# Altium PCB BreakoutBoard.PcbDoc
Units mm, origin at the board's own origin, x right, y up, seen from the top; angles counter-clockwise.
Board outline 104.01 x 101.6 mm, 4 copper layers (Top Layer, Layer 1, Layer 2, Bottom Layer), stack 0.603 mm thick; 14 components, 89 nets, 319 pads, 0 vias.
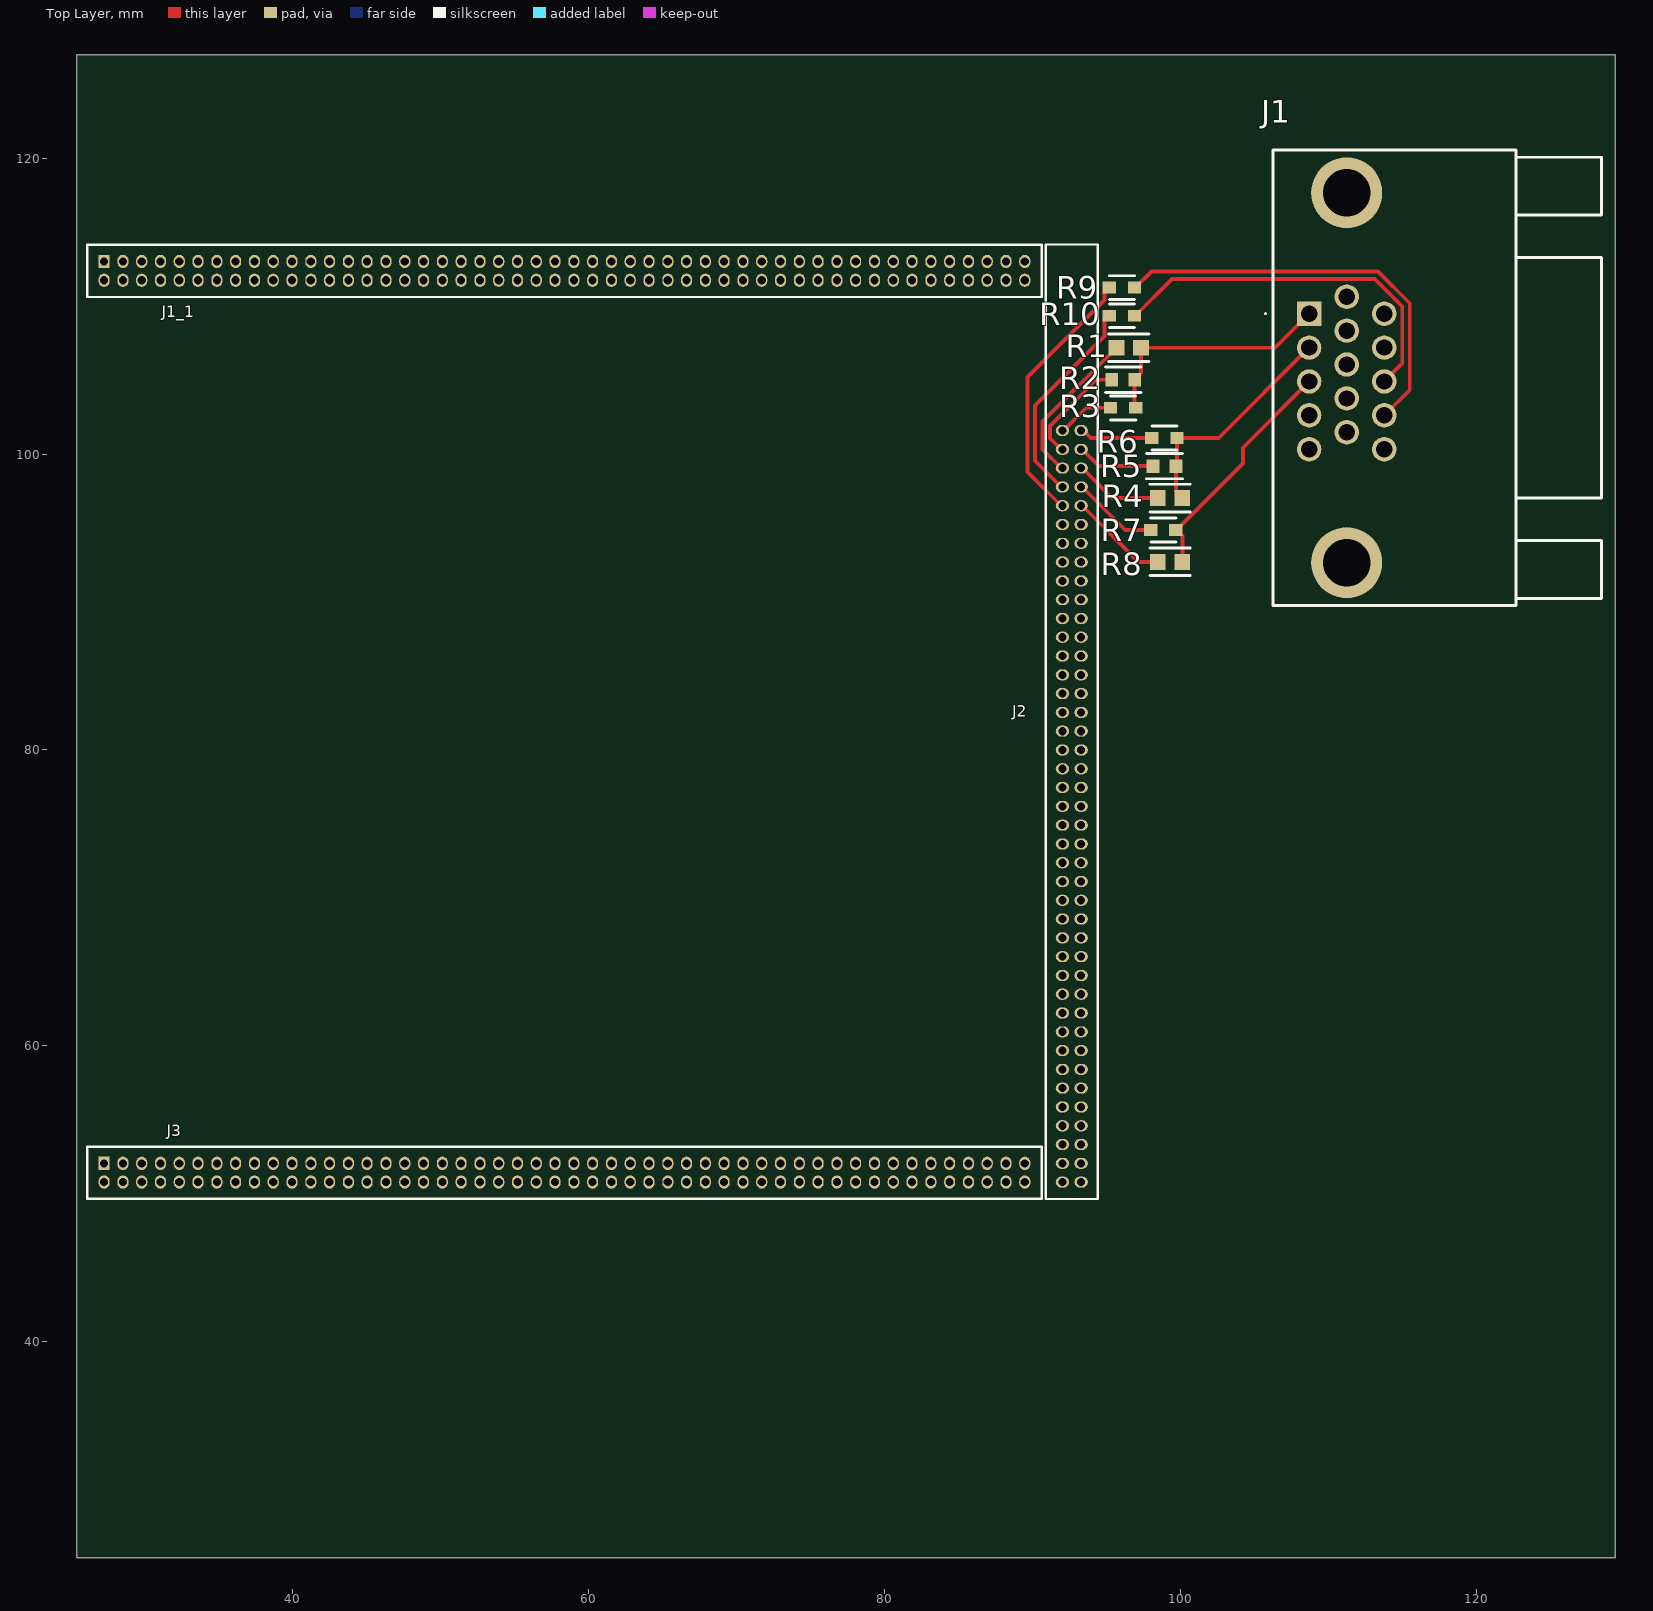
[diagram p0: Top Layer view]
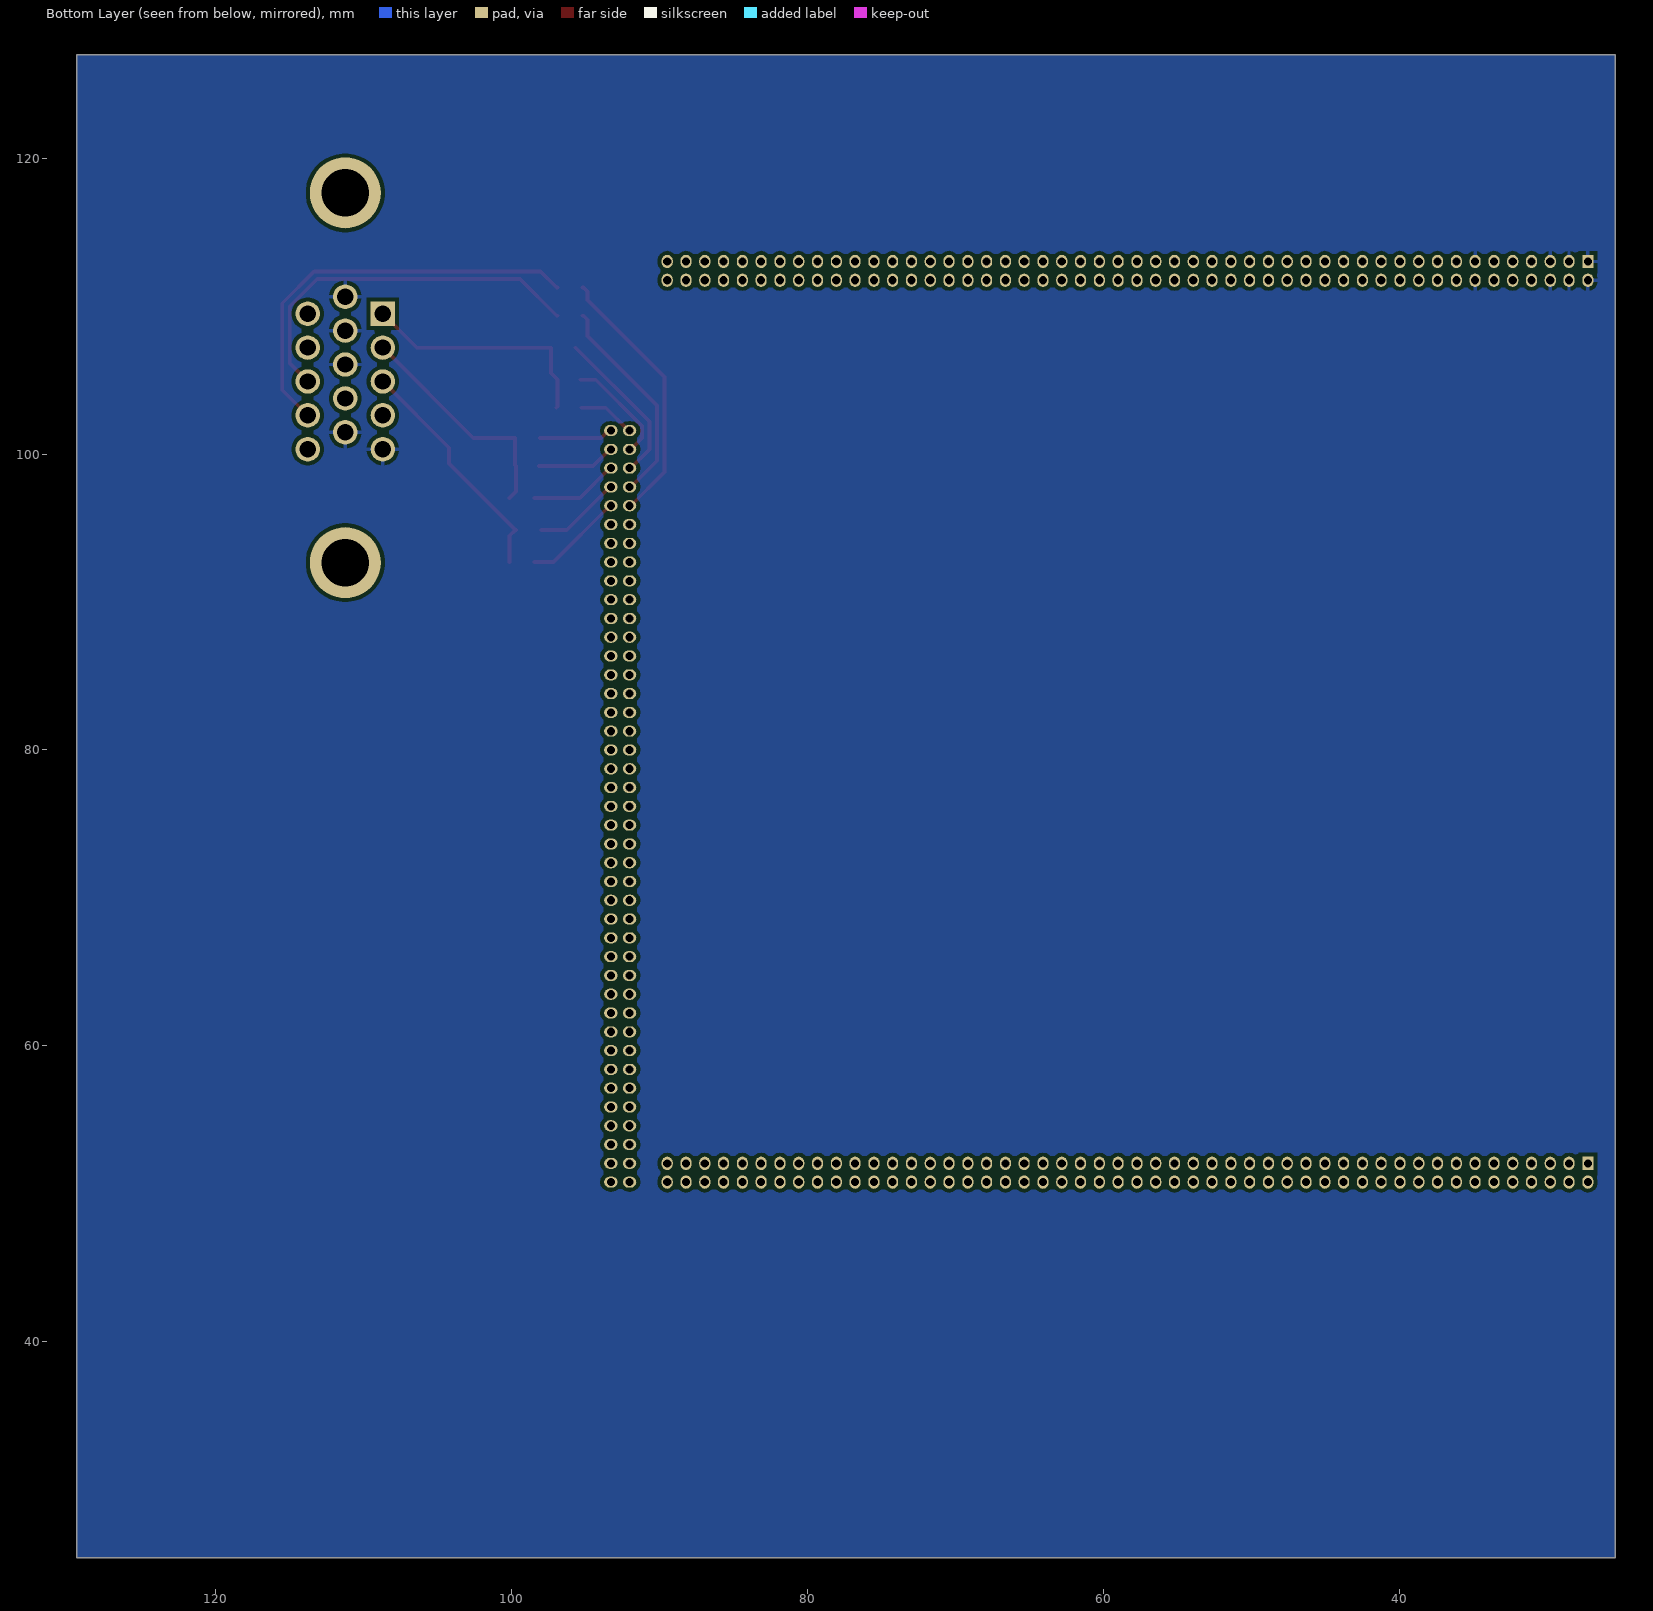
[diagram p1: Bottom Layer view, seen from below]
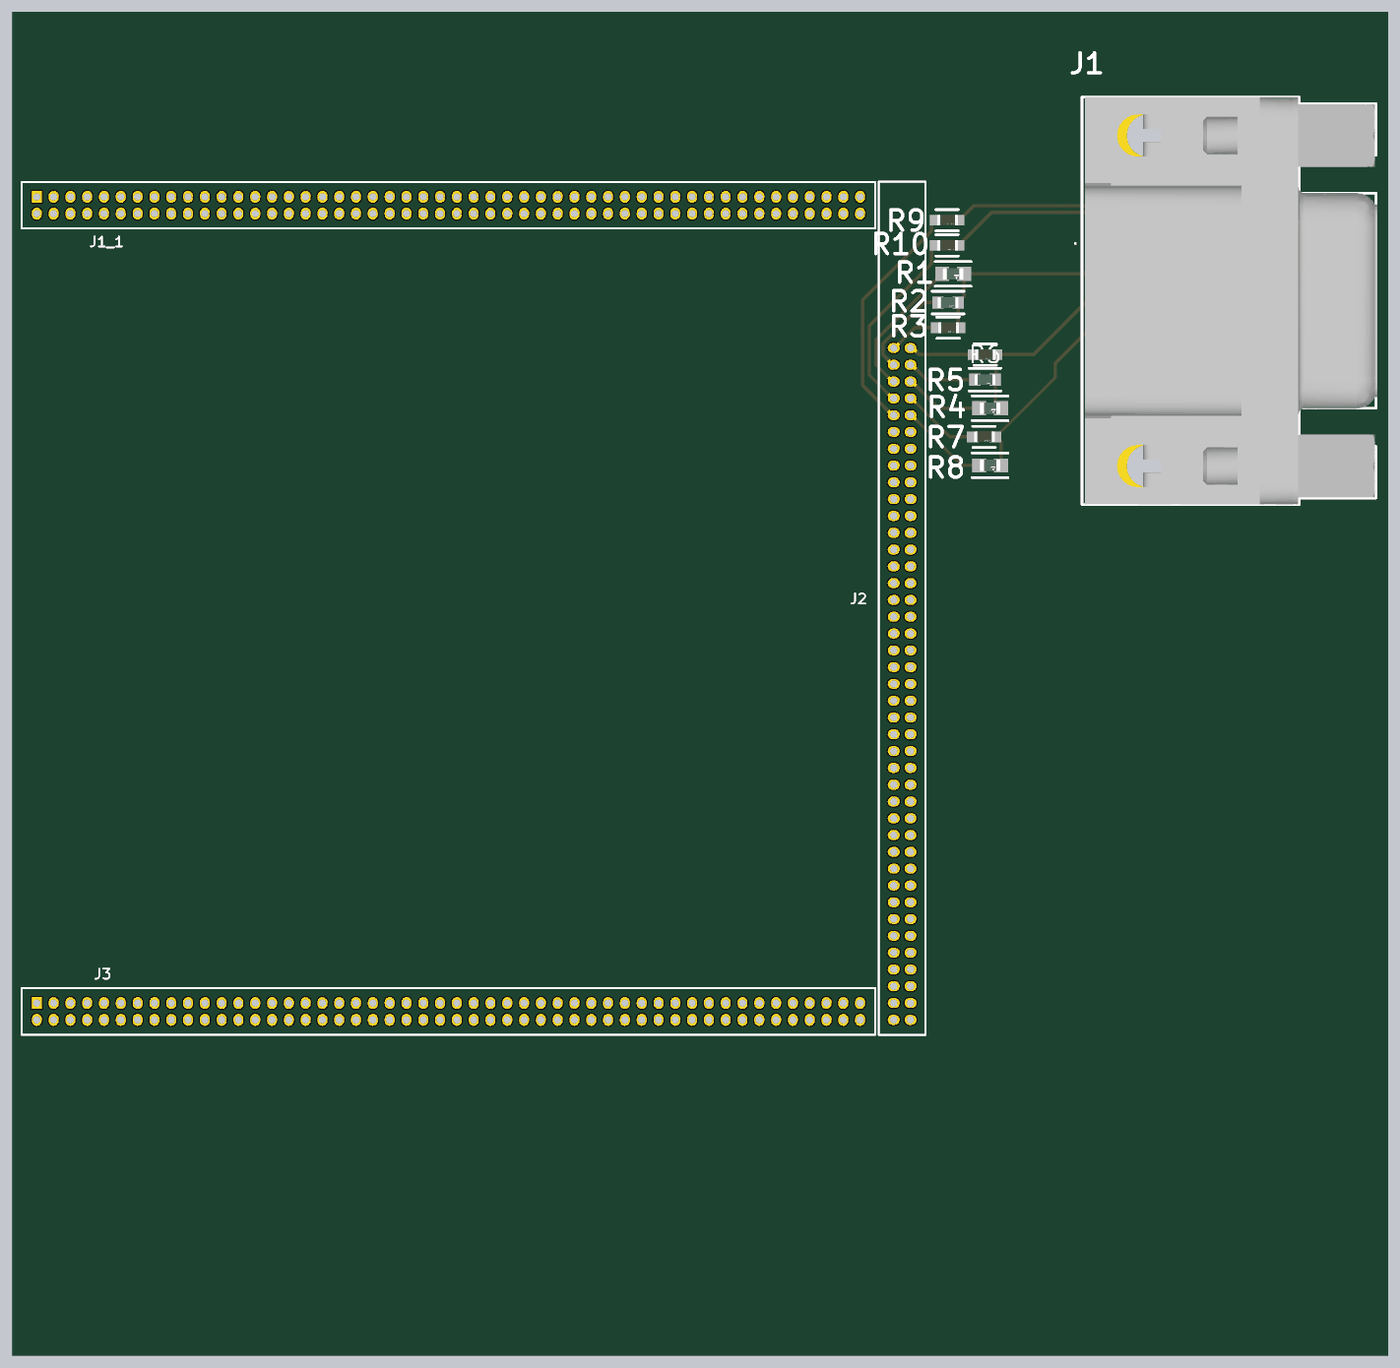
[diagram p2: 3D render of the assembled board from above, using the file's embedded part models]

## Layer stack, top to bottom
Top Solder: solder mask 0.0102, Solder Resist, Dk 3.5
Top Layer: signal copper 0.035
Dielectric 2: prepreg 0.0711, PP-006, Dk 4.1
Layer 1: signal copper 0.0356
Dielectric 1: dielectric 0.32, FR-4, Dk 4.8
Layer 2: signal copper 0.0356
Dielectric 3: prepreg 0.0711, PP-006, Dk 4.1
Bottom Layer: signal copper 0.035
Bottom Solder: solder mask 0.0102, Solder Resist, Dk 3.5

## Board outline
25.4,25.4 129.413,25.4 129.413,127 25.4,127

## Design rules (kind name [scope] priority, off if disabled: settings)
Clearance [All] p1: gap=0.254 ignorepadtopadclearanceinfootprint=FALSE
PolygonConnect [All] p1: connectstyle=Relief reliefconductorwidth=0.254 reliefentries=4 polygonreliefangle="90 Angle" airgapwidth=0.254
RoutingVias [All] p1: holewidth=0.711 width=1.27 viastyle="Through Hole" minholewidth=0.711 minwidth=1.27 maxholewidth=0.711 maxwidth=1.27
SolderMaskExpansion [All] p1: expansion=0.102 istentingtop=FALSE
SupplyNets "Schematic Supply Nets" [InNet('GND')] p1: voltage=0.000
Width [All] p1: maxlimit=0.254 minlimit=0.254 preferedwidth=0.254
30 further rules are at their usual default settings.

## Classes and differential pairs
component class VGA: J1 R1 R2 R3 R4 R5 R6 R7 R8 R9 R10
component class FPGA_IO: U?

## Components (designator, comment, footprint, x,y, rotation, side; value= is the part's Value field where it differs from the comment)
J1 "L77HDE15SD1CH4FVGA" L77HDE15SD1CH4FVGA 108.712,109.486 r90 top
J1_1 "DIP100-1.27" CON100_1.27#1 27.262,113.017 r270 top locked
J2 "DIP100-1.27" CON100_1.27#2 93.302,113.017 r180 top
J3 "DIP100-1.27" CON100_1.27#1 27.262,52.057 r270 top locked
R1 "MCT06030C2001FP500" FP-MCT0603-IPC_A 96.52,107.188 r0 top
R2 "AT0603FRE071KL" FP-AT0603-IPC_B 96.139,105.022 r0 top
R3 "RT0603FRE07510RL" FP-RT0603-MFG 96.139,103.124 r0 top value=510Ω
R4 "MCT06030C2001FP500" FP-MCT0603-IPC_A 99.314,97.028 r0 top
R5 "AT0603FRE071KL" FP-AT0603-IPC_B 98.933,99.187 r0 top
R6 "RT0603FRE07510RL" FP-RT0603-MFG 98.933,101.092 r0 top value=510Ω
R7 "RT0603FRE07866RL" FP-RT0603-MFG 98.853,94.869 r0 top value=866Ω
R8 "MCT06030C4640FP500" FP-MCT0603-IPC_A 99.314,92.71 r0 top
R9 "RT0603FRE0747RL" FP-RT0603-MFG 96.059,111.252 r0 top value=47Ω
R10 "RT0603FRE0747RL" FP-RT0603-MFG 96.059,109.347 r0 top value=47Ω

## Footprints (in the part's own frame and the unit in brackets; to place one, negate y for a bottom-side part, rotate by r counter-clockwise, add the part's x,y. Pads: shape width x height; smd on the part's side, far side on the other; paste and mask are expansions set on the pad)
CON100_1.27#1 [mm]
  rect 0.9x0.75 hole 0.55: 1(0,0)
  oval 0.9x0.75 hole 0.55: 2(1.27,0) 3(0,1.27) 4(1.27,1.27) 5(0,2.54) 6(1.27,2.54) 7(0,3.81) 8(1.27,3.81) 9(0,5.08) 10(1.27,5.08) 11(0,6.35) 12(1.27,6.35) 13(0,7.62) 14(1.27,7.62) 15(0,8.89) 16(1.27,8.89) 17(0,10.16) 18(1.27,10.16) 19(0,11.43) 20(1.27,11.43) 21(0,12.7) 22(1.27,12.7) 23(0,13.97) 24(1.27,13.97) 25(0,15.24) 26(1.27,15.24) 27(0,16.51) 28(1.27,16.51) 29(0,17.78) 30(1.27,17.78) 31(0,19.05) 32(1.27,19.05) 33(0,20.32) 34(1.27,20.32) 35(0,21.59) 36(1.27,21.59) 37(0,22.86) 38(1.27,22.86) 39(0,24.13) 40(1.27,24.13) 41(0,25.4) 42(1.27,25.4) 43(0,26.67) 44(1.27,26.67) 45(0,27.94) 46(1.27,27.94) 47(0,29.21) 48(1.27,29.21) 49(0,30.48) 50(1.27,30.48) 51(0,31.75) 52(1.27,31.75) 53(0,33.02) 54(1.27,33.02) 55(0,34.29) 56(1.27,34.29) 57(0,35.56) 58(1.27,35.56) 59(0,36.83) 60(1.27,36.83) 61(0,38.1) 62(1.27,38.1) 63(0,39.37) 64(1.27,39.37) 65(0,40.64) 66(1.27,40.64) 67(0,41.91) 68(1.27,41.91) 69(0,43.18) 70(1.27,43.18) 71(0,44.45) 72(1.27,44.45) 73(0,45.72) 74(1.27,45.72) 75(0,46.99) 76(1.27,46.99) 77(0,48.26) 78(1.27,48.26) 79(0,49.53) 80(1.27,49.53) 81(0,50.8) 82(1.27,50.8) 83(0,52.07) 84(1.27,52.07) 85(0,53.34) 86(1.27,53.34) 87(0,54.61) 88(1.27,54.61) 89(0,55.88) 90(1.27,55.88) 91(0,57.15) 92(1.27,57.15) 93(0,58.42) 94(1.27,58.42) 95(0,59.69) 96(1.27,59.69) 97(0,60.96) 98(1.27,60.96) 99(0,62.23) 100(1.27,62.23)
  silkscreen extent -1.12,-1.14 2.39,63.37
CON100_1.27#2 [mm]
  oval 0.9x0.75 hole 0.55: 19(0,11.43) 20(1.27,11.43) 21(0,12.7) 22(1.27,12.7) 23(0,13.97) 24(1.27,13.97) 25(0,15.24) 26(1.27,15.24) 27(0,16.51) 28(1.27,16.51) 29(0,17.78) 30(1.27,17.78) 31(0,19.05) 32(1.27,19.05) 33(0,20.32) 34(1.27,20.32) 35(0,21.59) 36(1.27,21.59) 37(0,22.86) 38(1.27,22.86) 39(0,24.13) 40(1.27,24.13) 41(0,25.4) 42(1.27,25.4) 43(0,26.67) 44(1.27,26.67) 45(0,27.94) 46(1.27,27.94) 47(0,29.21) 48(1.27,29.21) 49(0,30.48) 50(1.27,30.48) 51(0,31.75) 52(1.27,31.75) 53(0,33.02) 54(1.27,33.02) 55(0,34.29) 56(1.27,34.29) 57(0,35.56) 58(1.27,35.56) 59(0,36.83) 60(1.27,36.83) 61(0,38.1) 62(1.27,38.1) 63(0,39.37) 64(1.27,39.37) 65(0,40.64) 66(1.27,40.64) 67(0,41.91) 68(1.27,41.91) 69(0,43.18) 70(1.27,43.18) 71(0,44.45) 72(1.27,44.45) 73(0,45.72) 74(1.27,45.72) 75(0,46.99) 76(1.27,46.99) 77(0,48.26) 78(1.27,48.26) 79(0,49.53) 80(1.27,49.53) 81(0,50.8) 82(1.27,50.8) 83(0,52.07) 84(1.27,52.07) 85(0,53.34) 86(1.27,53.34) 87(0,54.61) 88(1.27,54.61) 89(0,55.88) 90(1.27,55.88) 91(0,57.15) 92(1.27,57.15) 93(0,58.42) 94(1.27,58.42) 95(0,59.69) 96(1.27,59.69) 97(0,60.96) 98(1.27,60.96) 99(0,62.23) 100(1.27,62.23)
  silkscreen extent -1.12,-1.14 2.39,63.37
FP-AT0603-IPC_B [mm]
  rect 0.859x0.912 smd paste+0 mask+0: 1(-0.777,0) 2(0.777,0)
  silkscreen extent -1.21,-0.86 1.21,0.86, body extent -1.46,-0.71 1.46,0.71, height 0.25
FP-MCT0603-IPC_A [mm]
  rect 1.064x1.062 smd paste+0 mask+0: 1(-0.829,0) 2(0.829,0)
  silkscreen extent -1.36,-0.93 1.36,0.93, body extent -1.86,-1.03 1.86,1.03, height 0.25
FP-RT0603-MFG [mm]
  rect 0.9x0.8 smd paste+0 mask+0: 1(-0.85,0) 2(0.85,0)
  silkscreen extent -0.85,-0.81 0.86,0.8, body extent -1.4,-0.55 1.4,0.55, height 0.25
L77HDE15SD1CH4FVGA [mm]
  rect 1.65x1.65 hole 1.1: 1(0,0)
  round 1.65 hole 1.1: 2(-2.29,0) 3(-4.58,0) 4(-6.87,0) 5(-9.16,0) 6(1.145,-2.54) 7(-1.145,-2.54) 8(-3.435,-2.54) 9(-5.725,-2.54) 10(-8.015,-2.54) 11(0,-5.08) 12(-2.29,-5.08) 13(-4.58,-5.08) 14(-6.87,-5.08) 15(-9.16,-5.08)
  round 4.8 hole 3.2: MH1(8.165,-2.54) MH2(-16.825,-2.54)
  silkscreen extent -19.73,-19.77 11.08,3, body extent -19.73,-19.89 11.08,2.21, height 12.48

## Part data
J1: "Connector", Manufacturer_Name="Amphenol Communications Solutions", Mouser Part Number=523-7HDE15SD1CH4FVGA, Arrow Part Number=L77HDE15SD1CH4FVGA, Arrow Price/Stock=https://www.arrow.com/en/products/l77hde15sd1ch4fvga/amphenol-fci?region=nac, Datasheet Link=https://cdn.amphenol-cs.com/media/wysiwyg/files/drawing/l77hde15sd1ch4fvga.pdf, Height=12.85mm, Manufacturer_Part_Number=L77HDE15SD1CH4FVGA, Mouser Price/Stock=https://www.mouser.co.uk/ProductDetail/Amphenol-Commercial-Products/L77HDE15SD1CH4FVGA?qs=ToP8pWlZ0bNtQSp9f8k5Rw%3D%3D
J1_1 J2 J3: library part CON100
R1 R4: library part CMP-02407-000403-1, "RES SMD 100 OHM 1% 1/8W 0603", Case Code (Imperial)=0603, Case Code (Metric)=1608, Max Operating Temperature=125°C, Max Power Dissipation=125mW, Min Operating Temperature=-55°C, Package Quantity=1, Power Rating=100mW, Resistance=2kR, Temperature Coefficient=50ppm/°C, Tolerance=1%, Voltage Rating=75V, Case/Package=0603, Composition="Thin Film", Contact Plating=Tin, Depth=0.85mm, Height=0.022inch, Lead Free="Lead Free", Length=1.55mm, Military Standard=Not, Mount="Surface Mount", Number of Terminations=2, Packaging="Tape and Reel", Radiation Hardening=No, REACH SVHC="No SVHC", Voltage Rating (DC)=75V, Width=0.033inch
R2 R5: library part CMP-03412-039220-1, "Thin Film Chip Resistors Automotive Grade 1kΩ 1% 50ppm/°C 0603", Case Code (Imperial)=0603, Case Code (Metric)=1608, Max Operating Temperature=155°C, Max Power Dissipation=100mW, Min Operating Temperature=-55°C, Ratings=AEC-Q200, Resistance=1kR, Resistor Type="Thin Film", Temperature Coefficient=50ppm/°C, Tolerance=1%, Case/Package=0603, Features="Moisture Resistant", Height=0.022inch, Length=0.063inch, Number of Terminations=2, Packaging="Cut Tape", RoHS Compliant=Yes, Series=AT, Width=0.032inch
R3 R6: library part CMP-2000-04767-2, "RES SMD 510 OHM 1% 1/10W 0603", Manufacturer=Yageo, Package=RT0603, Power Rating=0.1W, Resistance=510Ω, Temperature="-55°C to +155°C", Temperature Coefficient="50 ppm/°C", Temperature Range High=+155°C, Temperature Range Low=-55°C, Tolerance=0.01, Voltage Rating=75V, Automotive=No, Category=Res, ComponentLink2Description=Datasheet, ComponentLink2URL=http://www.yageo.com/documents/recent/PYu-RT_1-to-0.01_RoHS_L_9.pdf, Composition="Thin Film", Device Class L1="Passive Components", Device Class L2=Resistors, Device Class L3="Chip SMD Resistors", Digikey Description="RES SMD 510 OHM 1% 1/10W 0603", Footprint Url=http://www.yageo.com/exep/pages/download/literatures/PYu-R_Mount_10.pdf, Height=0.55mm, Ipc Land Pattern Name=RESC16080X45, Lead Free=Yes, Manufacturer Part Number=RT0603FRE07510RL, Mouser Description="Res Thin Film 0603 510 Ohm 1% 1/10W ±50ppm/°C Molded SMD SMD Paper T/R", Octopart=https://octopart.com/rt0603fre07510rl-yageo-1398442, RoHS=TRUE, Series=RT
R7: library part CMP-2000-04803-2, "RES SMD 866 OHM 1% 1/10W 0603", Manufacturer=Yageo, Package=RT0603, Power Rating=0.1W, Resistance=866Ω, Temperature="-55°C to +155°C", Temperature Coefficient="50 ppm/°C", Temperature Range High=+155°C, Temperature Range Low=-55°C, Tolerance=0.01, Voltage Rating=75V, Automotive=No, Category=Res, ComponentLink2Description=Datasheet, ComponentLink2URL=http://www.yageo.com/documents/recent/PYu-RT_1-to-0.01_RoHS_L_9.pdf, Composition="Thin Film", Device Class L1="Passive Components", Device Class L2=Resistors, Device Class L3="Chip SMD Resistors", Digikey Description="RES SMD 866 OHM 1% 1/10W 0603", Footprint Url=http://www.yageo.com/exep/pages/download/literatures/PYu-R_Mount_10.pdf, Height=0.55mm, Ipc Land Pattern Name=RESC16080X45, Lead Free=Yes, Manufacturer Part Number=RT0603FRE07866RL, Mouser Description="Thin Film Resistors - SMD 1/10W 866 ohm 1% 50ppm", Octopart=https://octopart.com/rt0603fre07866rl-yageo-1233978, RoHS=TRUE, Series=RT
R8: library part CMP-02407-000539-1, "RES SMD 100 OHM 1% 1/8W 0603", Case Code (Imperial)=0603, Case Code (Metric)=1608, Max Operating Temperature=125°C, Min Operating Temperature=-55°C, Power Rating=100mW, Resistance=464R, Temperature Coefficient=50ppm/°C, Tolerance=1%, Voltage Rating=75V, Case/Package=0603, Composition="Thin Film", Contact Plating=Tin, Depth=0.85mm, Lead Free="Lead Free", Length=1.55mm, Military Standard=Not, Mount="Surface Mount", Packaging="Cut Tape", Radiation Hardening=No, Voltage Rating (DC)=75V, Width=850um
R9 R10: library part CMP-03412-032644-1, "RES SMD 47 OHM 1% 1/10W 0603", Manufacturer=Yageo, Package=RT0603, Power Rating=0.1W, Resistance=47Ω, Temperature="-55°C to +155°C", Temperature Coefficient="50 ppm/°C", Temperature Range High=+155°C, Temperature Range Low=-55°C, Tolerance=0.01, Voltage Rating=75V, Automotive=No, Category=Res, ComponentLink2Description=Datasheet, ComponentLink2URL=http://www.yageo.com/documents/recent/PYu-RT_1-to-0.01_RoHS_L_9.pdf, Composition="Thin Film", Device Class L1="Passive Components", Device Class L2=Resistors, Device Class L3="Chip SMD Resistors", Digikey Description="RES SMD 47 OHM 1% 1/10W 0603", Footprint Url=http://www.yageo.com/exep/pages/download/literatures/PYu-R_Mount_10.pdf, Height=0.55mm, Ipc Land Pattern Name=RESC16080X45, Lead Free=Yes, Manufacturer Part Number=RT0603FRE0747RL, Mouser Description="RT Series 0603 0.1 W 47 Ohm ±1 % ±50 ppm/°C SMT Thin Film Chip Resistor", Octopart=https://octopart.com/rt0603fre0747rl-yageo-39813773, RoHS=TRUE, Series=RT

## Nets (pads, with @x,y where several pads share a name; then routed paths per layer and width w, separated by ;. In a path a pad name is that pad's centre, name@x,y a point inside that pad or via, vN(x,y) a via of type N, cw(c..) or ccw(c..) an arc to the next point about the centre after c; other vN are vias at no path point)
A9: 
A10: 
A12: 
A13: 
A14: 
AA13: J2.31
AA14: J2.32
AB14: J2.29
AB16: J2.30
AC13: J2.27 R8.1 | length 6.8
  Top Layer w0.254: J2.27 93.377,96.507 97.173,92.71 R8.1
AC14: J2.28 R9.1 | length 18.1
  Top Layer w0.254: J2.28 91.957,96.507 89.677,98.787 89.677,105.204 94.886,110.413 94.886,110.979 95.159,111.252 R9.1
AD13: J2.25 R7.1 | length 5.9
  Top Layer w0.254: J2.25 93.377,97.777 96.284,94.869 R7.1
AD14: J2.26 R10.1 | length 14.5
  Top Layer w0.254: J2.26 91.957,97.777 90.185,99.549 90.185,103.284 94.886,107.985 94.886,109.074 95.159,109.347 R10.1
AD15: J2.20 R3.1 | length 3.9
  Top Layer w0.254: J2.20 92.107,101.587 93.644,103.124 R3.1
AE13: J2.23 R4.1 | length 6
  Top Layer w0.254: J2.23 93.377,99.047 95.395,97.028 R4.1
AE15: J2.24 R1.1 | length 10.8
  Top Layer w0.254: J2.24 91.957,99.047 90.693,100.311 90.693,102.191 R1.1
AF13: J2.21 R5.1 | length 5.3
  Top Layer w0.254: J2.21 93.377,100.317 94.506,99.187 R5.1
AF14: J2.22 R2.1 | length 7.4
  Top Layer w0.254: J2.22 91.957,100.317 91.201,101.073 91.201,101.9 94.322,105.022 R2.1
AF15: J2.19 R6.1 | length 5
  Top Layer w0.254: J2.19 93.456,101.587 93.951,101.092 R6.1
B9: 
B10: 
B11: 
B12: 
B14: 
C9: 
C11: 
C12: 
C13: 
C14: 
D9: 
D10: 
D11: 
D13: 
D14: 
E10: 
E11: 
E12: 
F9: 
F10: 
F12: 
F13: 
F14: 
G9: 
G10: 
G11: 
G12: 
G14: 
GCLK1: 
GND: J1.5 J1.6 J1.7 J1.8 J1.10 J1_1.1 J1_1.2 J1_1.3 J1_1.4 J1_1.5 J1_1.6 J1_1.13 J1_1.14
H9: 
H11: 
H12: 
H13: 
H14: 
J9: 
J10: 
J11: 
J12: 
J13: 
J14: 
J15: 
K9: 
K10: 
NetJ1_1: 
NetJ1_2: 
NetJ1_3: 
NetJ1_13: 
NetJ1_14: 
NetR1_1: 
NetR2_1: 
NetR3_1: 
NetR4_1: 
NetR5_1: 
NetR6_1: 
NetR7_1: 
NetR8_1: 
NetR9_1: 
NetR10_1: 
VGA_BLUE: J1.3 R7.2 R8.2 | length 16.1
  Top Layer w0.254: R7.2 R7.2@99.753,94.869 ; R8.2 100.143,94.478 R7.2@99.753,94.869 ; J1.3 104.235,100.429 104.235,99.352 R7.2@99.753,94.869
VGA_GREEN: J1.2 R4.2 R5.2 R6.2 | length 15.7
  Top Layer w0.254: R4.2@100.143,97.028 99.71,97.461 R5.2 99.783,99.26 R6.2 102.608,101.092 J1.2
VGA_HS: J1.13 R10.2 | length 25.5
  Top Layer w0.254: R10.2 96.959,109.347 99.449,111.837 113.147,111.837 114.998,109.986 114.998,106.112 J1.13
VGA_RED: J1.1 R1.2 R2.2 R3.2 | length 16.6
  Top Layer w0.254: R2.2 96.916,103.197 R3.2 ; R2.2@96.916,105.049 97.349,105.482 R1.2 106.414,107.188 J1.1
VGA_VS: J1.14 R9.2 | length 28.2
  Top Layer w0.254: R9.2 96.959,111.252 98.052,112.345 113.357,112.345 115.506,110.196 115.506,104.33 J1.14
W12: J2.38
W13: J2.37
W14: J2.36
W15: J2.35
Y15: J2.34
Y16: J2.33
pads on no net: J1.4 J1.9 J1.11 J1.12 J1.15 J1.MH1 J1.MH2 J1_1.7 J1_1.8 J1_1.9 J1_1.10 J1_1.11 J1_1.12 J1_1.15 J1_1.16 J1_1.17 J1_1.18 J1_1.19 J1_1.20 J1_1.21 J1_1.22 J1_1.23 J1_1.24 J1_1.25 J1_1.26 J1_1.27 J1_1.28 J1_1.29 J1_1.30 J1_1.31 J1_1.32 J1_1.33 J1_1.34 J1_1.35 J1_1.36 J1_1.37 J1_1.38 J1_1.39 J1_1.40 J1_1.41 J1_1.42 J1_1.43 J1_1.44 J1_1.45 J1_1.46 J1_1.47 J1_1.48 J1_1.49 J1_1.50 J1_1.51 J1_1.52 J1_1.53 J1_1.54 J1_1.55 J1_1.56 J1_1.57 J1_1.58 J1_1.59 J1_1.60 J1_1.61 J1_1.62 J1_1.63 J1_1.64 J1_1.65 J1_1.66 J1_1.67 J1_1.68 J1_1.69 J1_1.70 J1_1.71 J1_1.72 J1_1.73 J1_1.74 J1_1.75 J1_1.76 J1_1.77 J1_1.78 J1_1.79 J1_1.80 J1_1.81 J1_1.82 J1_1.83 J1_1.84 J1_1.85 J1_1.86 J1_1.87 J1_1.88 J1_1.89 J1_1.90 J1_1.91 J1_1.92 J1_1.93 J1_1.94 J1_1.95 J1_1.96 J1_1.97 J1_1.98 J1_1.99 J1_1.100 J2.39 J2.40 J2.41 J2.42 J2.43 J2.44 J2.45 J2.46 J2.47 J2.48 J2.49 J2.50 J2.51 J2.52 J2.53 J2.54 J2.55 J2.56 J2.57 J2.58 J2.59 J2.60 J2.61 J2.62 J2.63 J2.64 J2.65 J2.66 J2.67 J2.68 J2.69 J2.70 J2.71 J2.72 J2.73 J2.74 J2.75 J2.76 J2.77 J2.78 J2.79 J2.80 J2.81 J2.82 J2.83 J2.84 J2.85 J2.86 J2.87 J2.88 J2.89 J2.90 J2.91 J2.92 J2.93 J2.94 J2.95 J2.96 J2.97 J2.98 J2.99 J2.100 J3.1 J3.2 J3.3 J3.4 J3.5 J3.6 J3.7 J3.8 J3.9 J3.10 J3.11 J3.12 J3.13 J3.14 J3.15 J3.16 J3.17 J3.18 J3.19 J3.20 J3.21 J3.22 J3.23 J3.24 J3.25 J3.26 J3.27 J3.28 J3.29 J3.30 J3.31 J3.32 J3.33 J3.34 J3.35 J3.36 J3.37 J3.38 J3.39 J3.40 J3.41 J3.42 J3.43 J3.44 J3.45 J3.46 J3.47 J3.48 J3.49 J3.50 J3.51 J3.52 J3.53 J3.54 J3.55 J3.56 J3.57 J3.58 J3.59 J3.60 J3.61 J3.62 J3.63 J3.64 J3.65 J3.66 J3.67 J3.68 J3.69 J3.70 J3.71 J3.72 J3.73 J3.74 J3.75 J3.76 J3.77 J3.78 J3.79 J3.80 J3.81 J3.82 J3.83 J3.84 J3.85 J3.86 J3.87 J3.88 J3.89 J3.90 J3.91 J3.92 J3.93 J3.94 J3.95 J3.96 J3.97 J3.98 J3.99 J3.100

## Polygon pours and split planes (outlines as drawn)
GND on Bottom Layer "GND" (solid, pour order 0): 129.413,25.4 25.4,25.4 25.4,127 129.413,127